# EAGLE board ppd42nj-i2c (EAGLE 6.6.0)
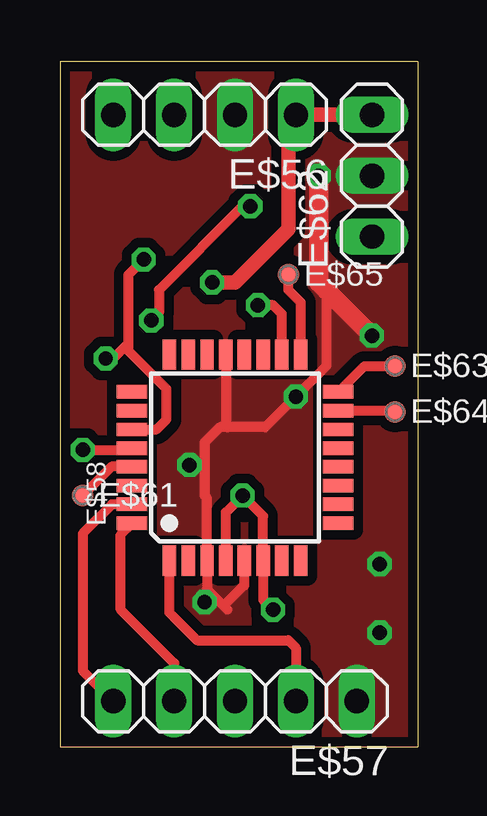
[diagram p0: board, top side]
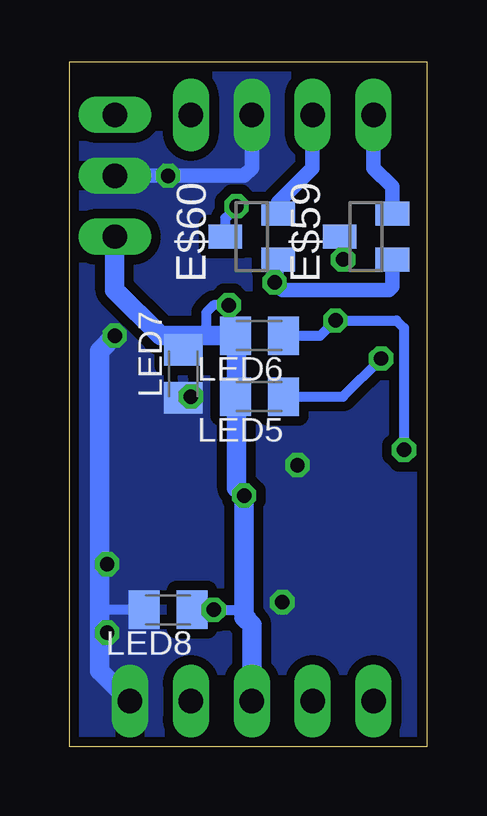
[diagram p1: board, bottom side, seen from below]

Size 14.92 x 28.57 mm. Coordinates in mm from the lower left corner, seen from the top.
Outline: 14.92,28.57 0,28.57 0,0 14.92,0 14.92,28.57
Copper layers (1*16): Top 0.035mm / dielectric 1.5mm / Bottom 0.035mm
Design rules "default *": minimum track width 0.15mm, minimum drill 0.4mm, track to track 0.2mm, track to pad 0.2mm, pad to pad 0.2mm, via to via 0.2mm, smd to smd 0mil, copper to edge 0.2mm, drill to drill 0.2mm, minimum pad ring 10mil, minimum via ring 8mil, stop-mask expansion 0mil, vias tented up to drill 0.7mm, thermal gap 0mil

## Footprints (pad centres in the part's own frame; a part is rotated, then mirrored left to right if it is on the bottom)
1X04 = drill 1.016 long: 1 -3.81,0; 2 -1.27,0; 3 1.27,0; 4 3.81,0
1X05 = drill 1.016 long: 1 -5.08,0; 2 -2.54,0; 3 0,0; 4 2.54,0; 5 5.08,0
TQFP32 = smd 1.27 x 0.559: 1 -4.293,2.743; 2 -4.293,1.956; 3 -4.293,1.168; 4 -4.293,0.381; 5 -4.293,-0.381; 6 -4.293,-1.168; 7 -4.293,-1.956; 8 -4.293,-2.743; 17 4.293,-2.743; 18 4.293,-1.956; 19 4.293,-1.168; 20 4.293,-0.381; 21 4.293,0.381; 22 4.293,1.168; 23 4.293,1.956; 24 4.293,2.743 | smd 0.559 x 1.27: 9 -2.743,-4.293; 10 -1.956,-4.293; 11 -1.168,-4.293; 12 -0.381,-4.293; 13 0.381,-4.293; 14 1.168,-4.293; 15 1.956,-4.293; 16 2.743,-4.293; 25 2.743,4.293; 26 1.956,4.293; 27 1.168,4.293; 28 0.381,4.293; 29 -0.381,4.293; 30 -1.168,4.293; 31 -1.956,4.293; 32 -2.743,4.293
SOT23 = smd 1 x 1.4: 1 -0.95,-1.1; 2 0.95,-1.1; 3 0,1.1
SMD09R = smd 0.9 x 0.9: PAD 0,0
1X03 = drill 1.016 long: 1 -2.54,0; 2 0,0; 3 2.54,0
C0805K = smd 1.3 x 1.6: 1 -1,0; 2 1,0

## Placement (x,y rotation side)
E$56  [1X04]  6.03,26.35 180 top
E$57  [1X05]  7.3,1.91 180 top
E$58  [TQFP32]  7.3,12.06 90 top
E$59  [SOT23]  2.54,21.27 90 bottom
E$60  [SOT23]  7.3,21.27 90 bottom
E$61  [SMD09R]  0.95,10.48 0 top
E$62  [1X03]  13.02,23.81 90 top
E$63  [SMD09R]  13.97,15.88 0 top
E$64  [SMD09R]  13.97,13.97 0 top
E$65  [SMD09R]  9.53,19.68 0 top
LED5  [C0805K]  6.99,14.61 180 bottom
LED6  [C0805K]  6.99,17.14 180 bottom
LED7  [C0805K]  10.16,15.56 90 bottom
LED8  [C0805K]  10.79,5.71 180 bottom

## Library data of the parts
E$56 E$57 E$62 = pinhead
E$58 = atmel-1
E$59 E$60 = ada
E$61 E$63-E$65 = dpads
LED5-LED8 = qfm-trx1-24g

## Nets
3V3: E$56.1 E$59.1 E$60.1 E$62.3
5V: E$57.3 E$58.4 E$58.6 E$62.1 LED8.1
GND: E$56.2 E$57.1 E$58.3 E$58.5 E$58.21 E$62.2 LED7.1 LED8.2
S$34: E$58.18 LED5.2 LED6.2
S$37: E$58.17 E$65.PAD
S$38: E$58.16 E$63.PAD
S$40: E$58.15 E$64.PAD
S$41: E$58.29 E$61.PAD
S$44: E$57.2 E$58.1
S$46: E$57.4 E$58.32
S$48: E$57.5 E$58.31
SCL: E$56.3 E$60.2
SCLHV: E$58.28 E$60.3 LED6.1
SDA: E$56.4 E$59.2
SDAHV: E$58.27 E$59.3 LED5.1

## Tracks (layer width: path | path; a pad name or v marks a point on that pad's centre or on a via)
3V3  (via drill 0.6)
  Top 0.61: E$62.3 E$56.1 9.53,26.04 9.53,21.59 7.3,19.37 v6.35,19.37
  Bottom 0.61: v6.35,19.37 6.35,20.18 E$60.1 6.2,20.15 v6.35,19.37 | v6.35,19.37 6.03,19.05 1.59,19.05 1.44,19.2 E$59.1
5V  (via drill 0.6)
  Top 0.406: E$58.4 6.92,9.78 v7.62,10.48 8.47,9.63 E$58.6 8.47,6.13 v8.89,5.71
  Bottom 0.406: v8.89,5.71 LED8.1 7.62,5.71 7.3,5.4 7.3,4.76
  Bottom 0.813: E$57.3 7.3,4.76 7.3,5.08 7.62,5.4 v7.62,10.48 7.94,10.79 7.94,17.14 11.11,17.14 13.02,19.05 E$62.1
GND  (via drill 0.6)
  Top 0.406: 11.11,19.05 11.11,15.88 v9.84,14.61 8.57,13.34 6.99,13.34 | E$58.21 6.92,13.4 6.99,13.34 | 6.99,13.34 6.67,13.34 6.03,12.7 6.03,10.48 6.13,10.38 E$58.3 6.13,6.57 6.83,5.87 | E$58.5 7.68,6.73 6.83,5.87 | 6.83,5.87 6.99,5.71
  Top 0.813: v10.79,23.81 10.79,19.37 11.11,19.05 v13.02,17.14
  Bottom 0.406: LED8.2 13.65,5.71 | LED7.1 9.89,14.56 v9.84,14.61
  Bottom 0.61: E$56.2 7.3,24.13 7.62,23.81 v10.79,23.81 E$62.2
  Bottom 0.813: E$57.1 13.65,3.17 13.65,5.71 13.65,16.51 v13.02,17.14
  other vias: 6.03,6.03 5.4,11.75 13.34,4.76 13.34,7.62
  pour Bottom (isolate 0.406): 0,28.26 16.19,28.26 16.19,0 0,0
  pour Top (isolate 0.406): 0,28.26 14.92,28.26 14.92,-1.27 0,-1.27
S$34  (via drill 0.6)
  Top 0.406: E$58.18 9.26,18.05 8.89,18.41 v8.26,18.41
  Bottom 0.406: v8.26,18.41 8.89,18.41 9.21,18.1 9.21,17.14
  Bottom 0.61: 9.21,17.14 LED6.2 LED5.2
S$37
  Top 0.406: E$58.17 10.05,18.53 9.53,19.05 E$65.PAD
S$38
  Top 0.406: E$58.16 11.63,14.81 12.7,15.88 E$63.PAD
S$40
  Top 0.406: E$58.15 13.92,14.02 E$64.PAD
S$41
  Top 0.406: E$58.29 2.16,11.68 E$61.PAD
S$44
  Top 0.406: E$58.1 4.56,5.6 5.71,4.45 9.53,4.45 9.84,4.13 E$57.2
S$46
  Top 0.406: E$57.4 4.76,3.49 2.54,5.71 2.54,8.85 E$58.32
S$48
  Top 0.406: E$58.31 2.17,10.11 0.95,8.89 0.95,3.17 E$57.5
SCL
  Bottom 0.61: E$60.2 6.2,22.69 4.76,24.13 E$56.3
SCLHV  (via drill 0.6)
  Top 0.406: v7.94,22.54 7.62,22.54 4.13,19.05 4.13,18.1 v3.81,17.78 | v0.95,12.38 2.95,12.38 E$58.28
  Bottom 0.406: E$60.3 8.4,22.05 v7.94,22.54 | v0.95,12.38 0.95,17.46 1.27,17.78 v3.81,17.78 4.45,17.14 LED6.1
SDA
  Bottom 0.61: E$59.2 1.44,23.35 2.22,24.13 E$56.4
SDAHV  (via drill 0.6)
  Top 0.406: E$58.27 4.03,13.23 4.45,13.65 4.45,14.92 2.86,16.51 2.86,16.83 | 2.86,16.83 2.86,19.68 v3.49,20.32 | v1.91,16.19 2.22,16.19 2.86,16.83
  Bottom 0.406: v3.49,20.32 3.49,21.42 E$59.3 | LED5.1 3.49,14.61 v1.91,16.19